# Altium PCB half_bridge.PcbDoc
Units mm, origin at the board's own origin, x right, y up, seen from the top; angles counter-clockwise.
Board outline 152.4 x 101.6 mm, 2 copper layers (Top Layer, Bottom Layer), stack 1.569 mm thick; 25 components, 16 nets, 68 pads, 0 vias.
Unrouted connection lines stored in the file: 50.
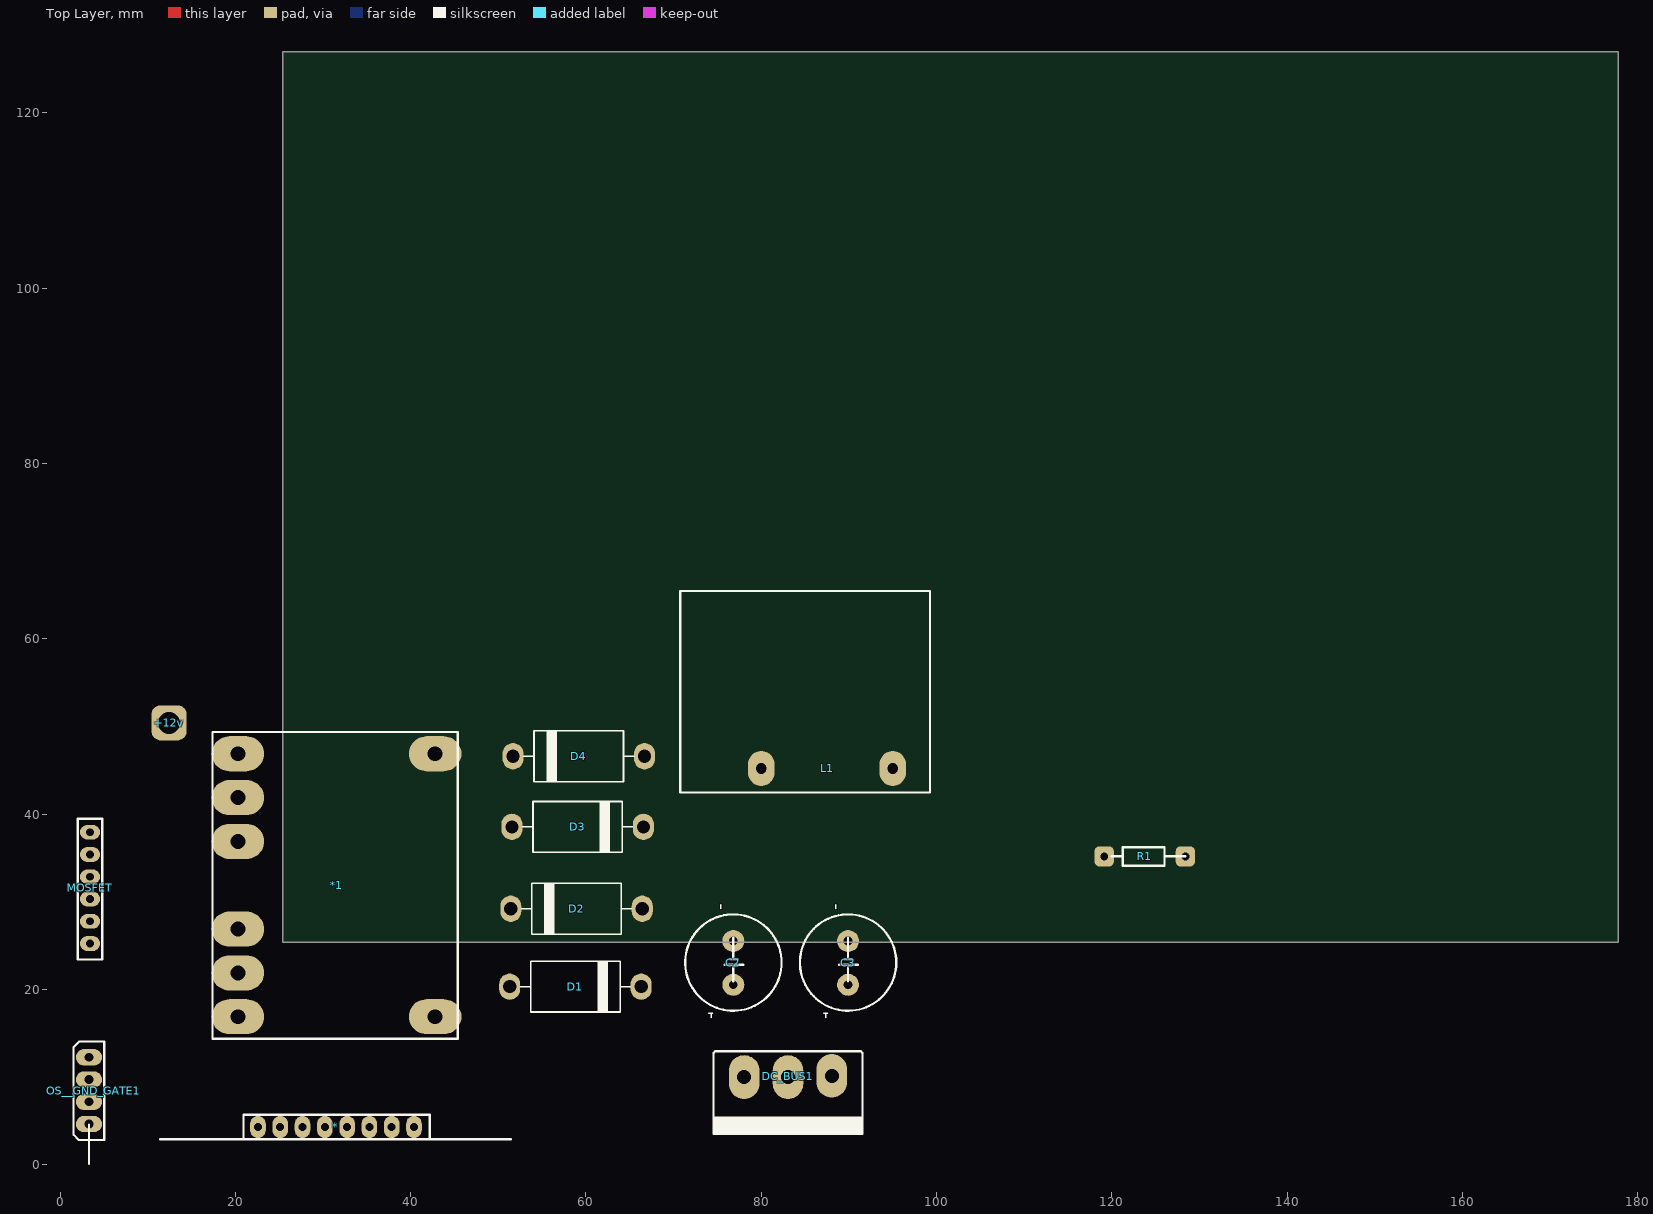
[diagram p0: Top Layer view]
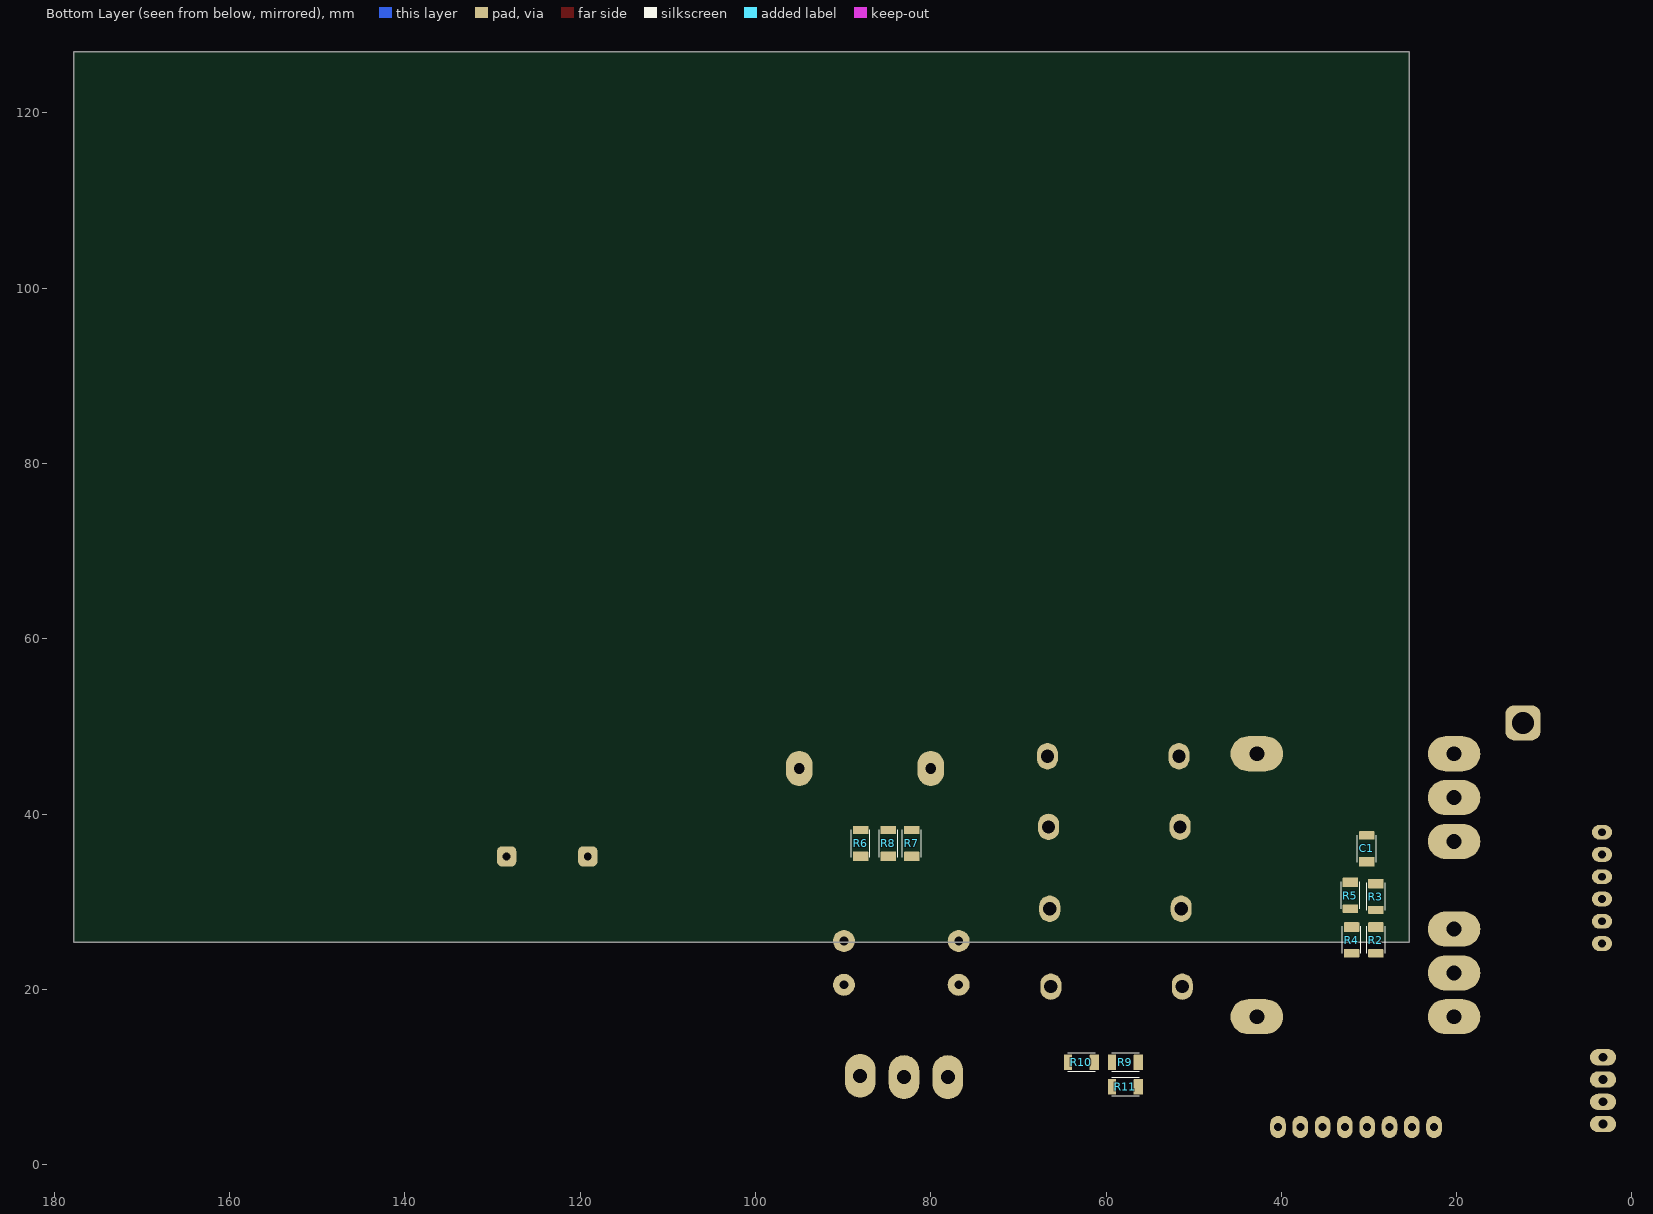
[diagram p1: Bottom Layer view, seen from below]

## Layer stack, top to bottom
Top Solder: solder mask 0.0254, SM-001, Dk 4
Top Layer: signal copper 0.035
Dielectric 1: core 1.4986, Core-043, Dk 4.3
Bottom Layer: signal copper 0.035
Bottom Solder: solder mask 0.0254, SM-001, Dk 4

## Board outline
25.4,25.4 177.8,25.4 177.8,127 25.4,127

## Design rules (kind name [scope] priority, off if disabled: settings)
Clearance [All] p1: gap=0.254 ignorepadtopadclearanceinfootprint=FALSE except(0: Arc-Hole Track-Hole SMDPad-Hole THPad-Hole Via-Hole Fill-Hole Poly-Hole Region-Hole Text-Hole)
PolygonConnect [All] p1: connectstyle=Relief reliefconductorwidth=0.254 reliefentries=4 polygonreliefangle="90 Angle" airgapwidth=0.254
RoutingVias [All] p1: holewidth=0.711 width=1.27 viastyle="Through Hole" minholewidth=0.711 minwidth=1.27 maxholewidth=0.711 maxwidth=1.27
SolderMaskExpansion [All] p1: expansion=0.102 istentingtop=FALSE
Width [All] p1: maxlimit=0.254 minlimit=0.254 preferedwidth=0.254
30 further rules are at their usual default settings.

## Components (designator, comment, footprint, x,y, rotation, side; value= is the part's Value field where it differs from the comment)
* "pin_header_8pin" pin_header8 40.302,4.308 r180 top
*1 "TRANS-FT8350C" "EI 3329D" 42.799,16.891 r90 top
+12v "PIN1" PIN1 12.446,50.419 r90 top
C1 "10nF" CAP-1206 30.129,36.068 r90 bottom
C2 "33uF" CAP-EL_P5MM 76.832,20.518 r90 top
C3 "33uF" CAP-EL_P5MM 89.926,20.517 r90 top
D1 "DIOD/RECTIFIERS" 1N4508_REZA 66.308,20.32 r0 top
D2 "DIOD/RECTIFIERS" 1N4508_REZA 51.432,29.21 r180 top
D3 "DIOD/RECTIFIERS" 1N4508_REZA 66.559,38.552 r0 top
D4 "DIOD/RECTIFIERS" 1N4508_REZA 51.689,46.609 r180 top
DC_BUS1 "" CONECTOR/FONIX/3PIN 78.058,10 r0 top
L1 "375uH" EI-28-SELF_DC 95.01,45.212 r90 top
MOS__GND_GATE1 "CONECTOR/XH/4PIN" CONECTOR/XH/4PIN 3.302,4.641 r90 top
MOSFET "" pin_header_6pin 3.429,25.237 r90 top
R1 "10R" RES/0.25W 119.139,35.179 r0 top
R2 "10R" RES/1206 29.344,25.654 r270 bottom
R3 "10R" RES/1206 29.344,30.607 r270 bottom
R4 "10R" RES/1206 32.131,25.654 r270 bottom
R5 "10R" RES/1206 32.262,30.746 r270 bottom
R6 "1.5R" RES/1206 87.877,36.648 r90 bottom
R7 "1.5R" RES/1206 82.042,36.648 r90 bottom
R8 "1.5R" RES/1206 84.705,36.648 r90 bottom
R9 "r" RES/1206 57.785,11.811 r0 bottom
R10 "r" RES/1206 62.81,11.815 r0 bottom
R11 "r" RES/1206 57.785,9.017 r0 bottom

## Footprints (in the part's own frame and the unit in brackets; to place one, negate y for a bottom-side part, rotate by r counter-clockwise, add the part's x,y. Pads: shape width x height; smd on the part's side, far side on the other; paste and mask are expansions set on the pad)
1N4508_REZA [mm]
  oval 2.4x3 hole 1.5: A(-15,0) K(0,0)
  silkscreen extent -13.8,-3 -1.2,2.9, body extent -15.78,-2.8 0.78,2.8, height 7.6
CAP-1206 [mm]
  rrect14% 1.09x1.77 smd: 1(-1.488,0.139)
  rrect14% 0.94x1.77 smd: 2(1.517,0.139)
  silkscreen extent -1.57,-0.93 1.53,1.2, body extent -1.63,-0.6 1.57,0.9, height 1.6
CAP-EL_P5MM [mm]
  round 2.5 hole 1: +(0.01,0.01) -(5.01,0.01)
  silkscreen extent -2.95,-5.49 8.05,5.51, body extent -2.48,-4.86 7.52,5.14, height 16
CONECTOR/FONIX/3PIN [mm]
  oval 3.5x5 hole 1.6: 1(0,0) 2(5,0) 3(10,0.144)
  silkscreen extent -3.5,-6.5 13.5,2.96, body extent -3.5,-10 13.5,2, height 8.8
CONECTOR/XH/4PIN [mm]
  oval 1.85x3 hole 1: 1(0,0) 2(2.54,0) 3(5.08,0) 4(7.62,0)
  silkscreen extent -1.81,-1.73 9.43,1.75
"EI 3329D" [mm]
  oval 4x6 hole 1.7: 1(20,22.5) 1(25,22.5) 1(30,22.5) 2(0,22.5) 2(5,22.5) 2(10,22.5) 3(30,0) 4(0,0)
  silkscreen extent -2.51,-2.59 32.49,25.41
EI-28-SELF_DC [mm]
  oval 4x3 hole 1.25: 1(0,15) 2(0,0)
  silkscreen extent -2.75,-4.25 20.25,24.25
PIN1 [mm]
  rrect50% 4x4 hole 2.5: 1(0,0)
pin_header8 [mil]
  oval 70x100 hole 36: 1(-3.33,-0.39) 2(96.67,-0.39) 3(196.67,-0.39) 4(296.67,-0.39) 5(396.69,0) 6(497.44,-0.01) 7(597.44,0) 8(697.44,0)
  silkscreen extent -75,-55 763,55
pin_header_6pin [mm]
  oval 1.7x2.3 hole 0.9: 1(0,0) 2(2.54,0) 3(5.08,0) 4(7.62,0) 5(10.16,0) 6(12.7,0)
  silkscreen extent -1.81,-1.4 14.23,1.4
RES/0.25W [mm]
  rrect50% 2.2x2.3 hole 0.9: 1(0,0) 2(9.258,0)
  silkscreen extent 0.85,-1.07 9.26,1.05, body extent 0.81,-1.08 8.41,1.12, height 2.1
RES/1206 [mm]
  rrect14% 1.09x1.77 smd: 1(-1.469,0.131)
  rrect14% 0.94x1.77 smd: 2(1.536,0.131)
  silkscreen extent -1.55,-0.93 1.55,1.2, body extent -1.51,-0.65 1.59,0.9, height 0.55

## Part data
C1: library part cap_smd
C2 C3: library part cap-electrolit
DC_BUS1: library part CONECTOR/FONIX/3PIN, SYSTEM=CONNECTOR
L1: library part inductor
MOSFET: library part PIN_HEADER6
R1: library part RES/<1W
R2 R3 R4 R5 R6 R7 R8 R9 R10 R11: library part RES/SMD

## Nets (pads, with @x,y where several pads share a name; then routed paths per layer and width w, separated by ;. In a path a pad name is that pad's centre, name@x,y a point inside that pad or via, vN(x,y) a via of type N, cw(c..) or ccw(c..) an arc to the next point about the centre after c; other vN are vias at no path point)
+12: *1.1 +12v.1 C1.2
+24: *.7 MOS__GND_GATE1.2
+220: C2.+ C3.+ D1.K D3.K DC_BUS1.1 R10.2
F_SHANT: *.2 L1.1 R6.2 R7.2 R8.2
FB_V: *.1 R9.1 R11.1
GND: *.8 C2.- C3.- DC_BUS1.3 MOS__GND_GATE1.1 R6.1 R7.1 R8.1 R11.2
Net*1_3: *1.3 D3.A D4.K
Net*1_4: *1.4 D1.A D2.K
Net*_5: *.5 MOS__GND_GATE1.4
Net*_6: *.6 MOS__GND_GATE1.3
NetC1_1: C1.1 R1.2 R3.1 R5.1
NetD2_A: D2.A D4.A L1.2
NetR2_1: R2.1 R3.2
NetR4_1: R4.1 R5.2
NetR9_2: R9.2 R10.1
VS: *1.2 *.4 MOSFET.1 MOSFET.2 MOSFET.3 MOSFET.4 MOSFET.5 MOSFET.6 R1.1 R2.2 R4.2
pads on no net: *.3 DC_BUS1.2

## Silkscreen, mask and mechanical layers (free items; w line width, h text height)
Top Overlay:
  lines w0.254: 3.302,0.072 3.302,4.572 ; 11.43,2.921 51.43,2.921

## Text inside footprints (layer, text, board x,y; h text height)
C2: Top Overlay "-" at 76.027,29.058 h1.52 r90; Top Overlay "-" at 74.92,16.612 h1.52 r90; Top Overlay "-" at 74.668,17.881 h1.52 r180
C3: Top Overlay "-" at 89.121,29.057 h1.52 r90; Top Overlay "-" at 88.014,16.611 h1.52 r90; Top Overlay "-" at 87.762,17.88 h1.52 r180